# EAGLE board esp32-driver brd (EAGLE 7.5.0)
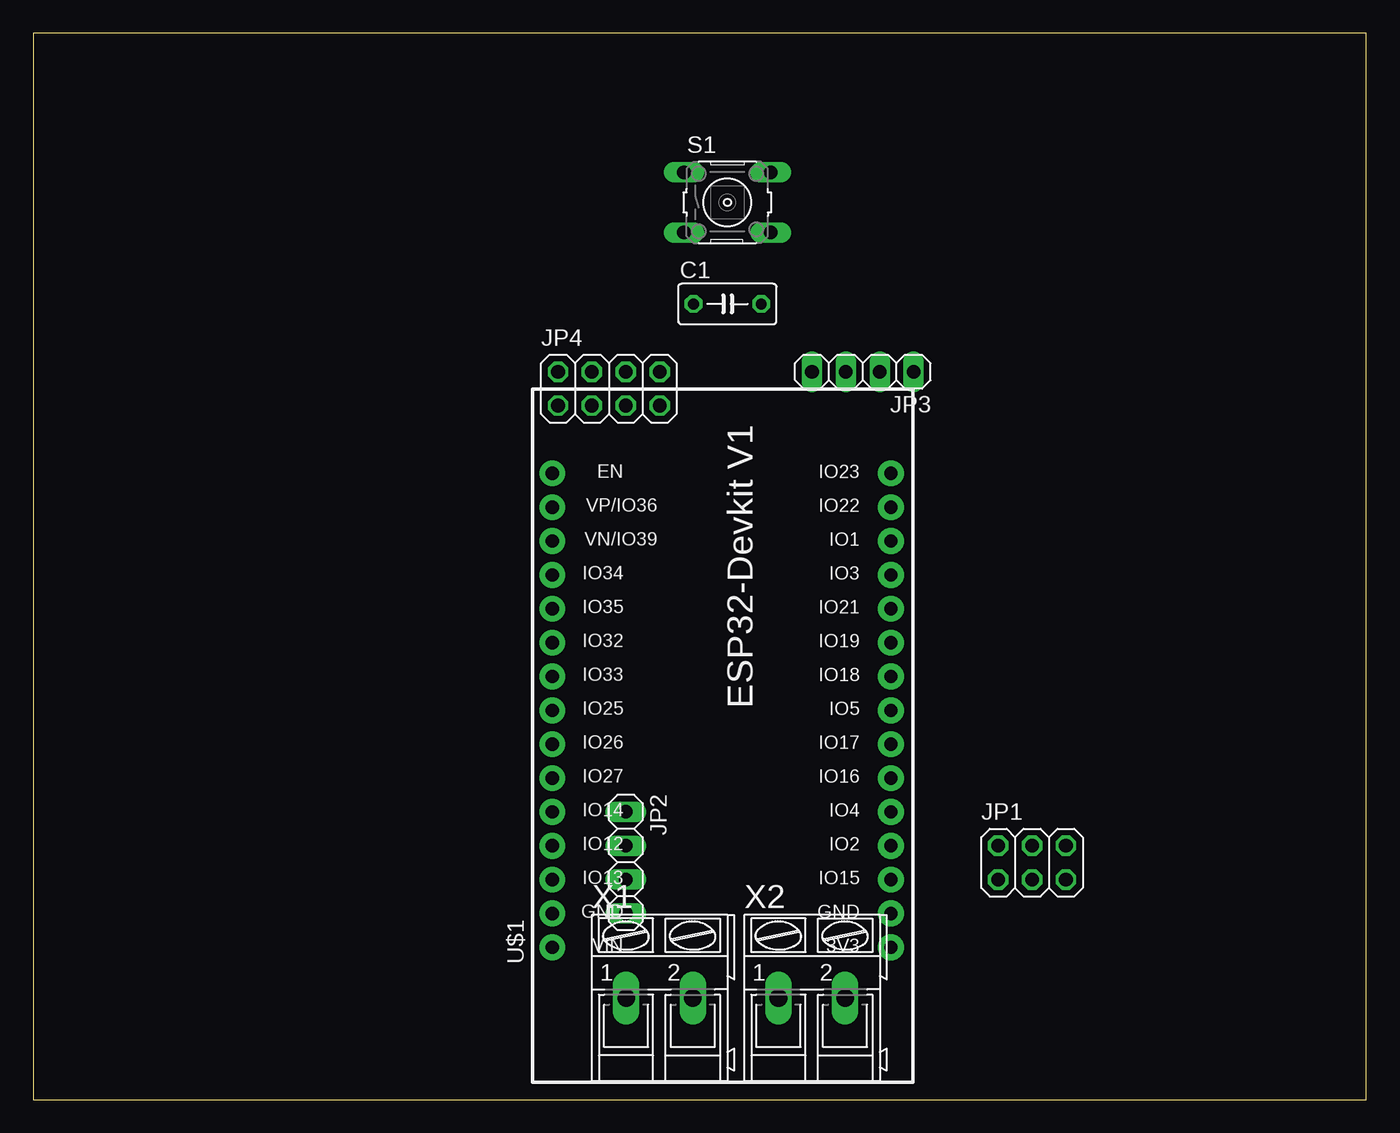
[diagram p0: board, top side]
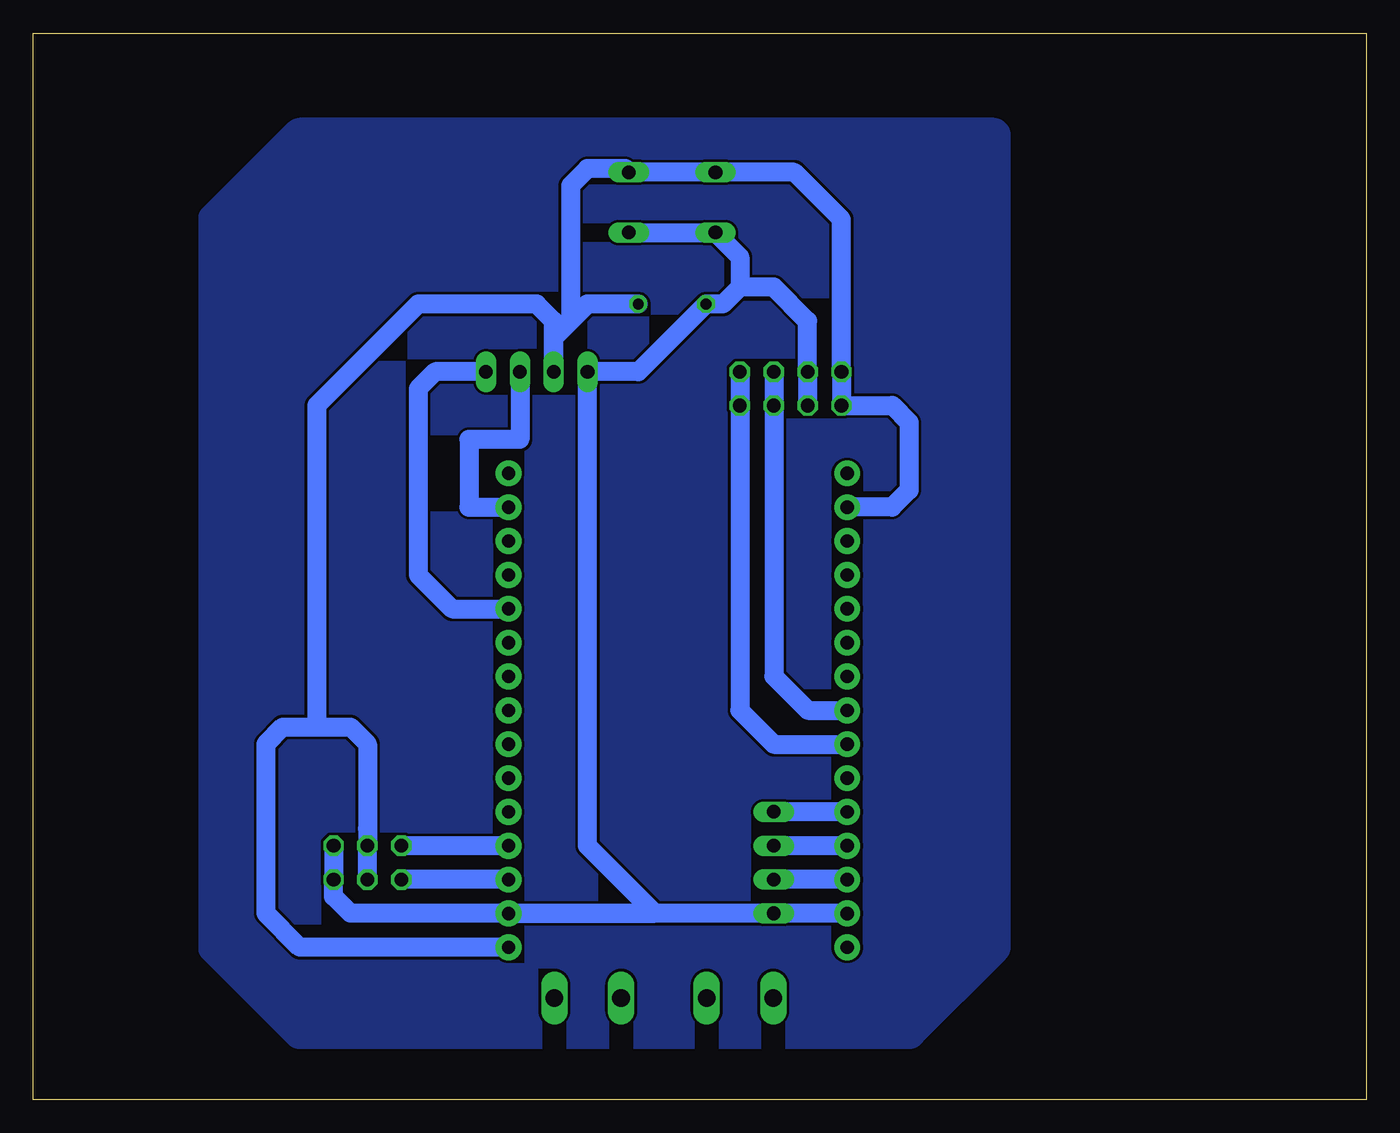
[diagram p1: board, bottom side, seen from below]

Size 100 x 80 mm. Coordinates in mm from the lower left corner, seen from the top.
Outline: 0,0 100,0 100,80 0,80 0,0
Copper layers (1*16): Top 0.035mm / dielectric 1.5mm / Bottom 0.035mm
Design rules "default": minimum track width 10mil, minimum drill 24mil, track to track 8mil, track to pad 8mil, pad to pad 8mil, via to via 8mil, smd to smd 8mil, copper to edge 40mil, drill to drill 8mil, minimum pad ring 10mil, minimum via ring 8mil, stop-mask expansion 4mil, vias tented up to drill 0mil, thermal gap 10mil

## Footprints (pad centres in the part's own frame; a part is rotated, then mirrored left to right if it is on the bottom)
C050-030X075 = drill 0.813 octagon: 1 -2.54,0; 2 2.54,0
2X03 = drill 1.016 octagon: 1 -2.54,-1.27; 2 -2.54,1.27; 3 0,-1.27; 4 0,1.27; 5 2.54,-1.27; 6 2.54,1.27
1X04 = drill 1.016 long: 1 -3.81,0; 2 -1.27,0; 3 1.27,0; 4 3.81,0
2X04 = drill 1.016 octagon: 1 -3.81,-1.27; 2 -3.81,1.27; 3 -1.27,-1.27; 4 -1.27,1.27; 5 1.27,-1.27; 6 1.27,1.27; 7 3.81,-1.27; 8 3.81,1.27
B3F-10XX = drill 1.016 long: 1 -3.251,2.261; 2 3.251,2.261; 3 -3.251,-2.261; 4 3.251,-2.261
ESP32-DEVKITV1 = drill 1 pad 1.93: 3V3 -16.52,-12.27; D1 13.96,-12.27; D2 -8.9,-12.27; D3 11.42,-12.27; D4 -6.36,-12.27; D5 1.26,-12.27; D12 -8.9,13.135; D13 -11.44,13.135; D14 -6.36,13.135; D15 -11.44,-12.27; D16 -3.82,-12.27; D17 -1.28,-12.27; D18 3.8,-12.27; D19 6.34,-12.27; D21 8.88,-12.27; D22 16.5,-12.27; D23 19.04,-12.27; D25 1.26,13.135; D26 -1.28,13.135; D27 -3.82,13.135; D32 6.34,13.135; D33 3.8,13.135; D34 11.42,13.135; D35 8.88,13.135; D36 16.5,13.135; D39 13.96,13.135; EN 19.04,13.135; GND@1 -13.98,13.135; GND@2 -13.98,-12.27; VIN -16.52,13.135
AK300/2 = drill 1.321 long: 1 -2.515,0; 2 2.489,0

## Placement (x,y rotation side)
C1  [C050-030X075]  52.07,59.69 0 top
JP1  [2X03]  74.93,17.78 0 top
JP2  [1X04]  44.45,17.78 270 top
JP3  [1X04]  62.23,54.61 180 top
JP4  [2X04]  43.18,53.34 0 top
S1  [B3F-10XX]  52.07,67.31 0 top
U$1  ESP32DEVKITV1  [ESP32-DEVKITV1]  52.07,27.94 90 top
X1  [AK300/2]  46.99,7.62 0 top
X2  [AK300/2]  58.42,7.62 0 top

## Library data of the parts
C1 = rcl; SPICEPREFIX: C
JP1-JP4 = pinhead
S1 = switch-omron; MPN: B3F-1000; OC_FARNELL: 176432; OC_NEWARK: 36M3542
U$1 = esp32-devkitv1
X1 X2 = con-ptr500; OC_FARNELL: unknown; OC_NEWARK: unknown

## Nets
GND: C1.1 JP1.5 JP1.6 JP2.4 JP3.4 JP4.3 JP4.4 S1.3 S1.4 U$1.GND@1 U$1.GND@2
MOISTURE: JP1.2 U$1.D2
OUT1: JP2.1 U$1.D14
OUT2: JP2.2 U$1.D12
OUT3: JP2.3 U$1.D13
PH: JP1.1 U$1.D15
SCL: JP3.2 U$1.D22
SCL2: JP4.5 JP4.6 U$1.D25
SDA: JP3.1 U$1.D21
SDA2: JP4.7 JP4.8 U$1.D26
V: C1.2 JP1.3 JP1.4 JP3.3 JP4.1 JP4.2 S1.1 S1.2 U$1.3V3 U$1.D36
VIN: U$1.VIN

## Tracks (layer width: path | path; a pad name or v marks a point on that pad's centre or on a via)
GND
  Bottom 1.422: S1.4 S1.3 46.99,63.22 46.99,60.96 | 46.99,60.96 48.26,59.69 C1.1 54.61,54.61 JP3.4 58.42,19.05 53.34,13.97 | 46.99,60.96 44.45,60.96 41.91,58.42 JP4.4 JP4.3 | U$1.GND@2 JP2.4 | U$1.GND@2 76.2,13.97 77.47,15.24 JP1.5 JP1.6 | U$1.GND@2 53.34,13.97 | U$1.GND@1 JP2.4 | JP2.4 53.34,13.97
MOISTURE
  Bottom 1.422: U$1.D2 JP1.2
N$1
  pour Bottom: 29.21,72.39 80.01,72.39 86.36,66.04 86.36,11.43 80.01,5.08 34.29,5.08 27.94,11.43 27.94,72.39
OUT1
  Bottom 1.422: U$1.D14 JP2.1
OUT2
  Bottom 1.422: U$1.D12 JP2.2
OUT3
  Bottom 1.422: U$1.D13 JP2.3
PH
  Bottom 1.422: U$1.D15 JP1.1
SCL
  Bottom 1.422: JP3.2 63.5,49.53 67.31,49.53 67.31,44.45 67.3,44.44 U$1.D22
SCL2
  Bottom 1.422: JP4.6 JP4.5 44.45,31.75 41.9,29.2 U$1.D25
SDA
  Bottom 1.422: JP3.1 69.85,54.61 71.12,53.34 71.12,39.37 68.57,36.82 U$1.D21
SDA2
  Bottom 1.422: JP4.8 JP4.7 46.99,29.21 44.44,26.66 U$1.D26
V
  Bottom 1.422: C1.2 58.42,59.69 59.69,58.42 | 59.69,58.42 60.96,57.15 JP3.3 60.96,58.42 62.23,59.69 71.12,59.69 78.74,52.07 78.74,27.94 | U$1.D36 35.57,44.44 34.29,45.72 34.29,50.8 35.56,52.07 JP4.1 JP4.2 39.37,66.04 42.9,69.57 S1.1 S1.2 55.6,69.85 58.42,69.85 59.69,68.58 59.69,58.42 | U$1.3V3 80.01,11.43 82.55,13.97 82.55,26.67 81.28,27.94 78.74,27.94 | 78.74,27.94 76.2,27.94 74.93,26.67 74.93,20.32 JP1.4 JP1.3